# Altium PCB lab1_yarmak_usb_spi.PcbDoc
Units mm, origin at the board's own origin, x right, y up, seen from the top; angles counter-clockwise.
Board outline 40 x 20 mm, 4 copper layers (Top Layer, Signal Layer 1, Signal Layer 2, Bottom Layer), stack 1.522 mm thick; 24 components, 23 nets, 98 pads, 17 vias.
Unrouted connection lines stored in the file: 7.
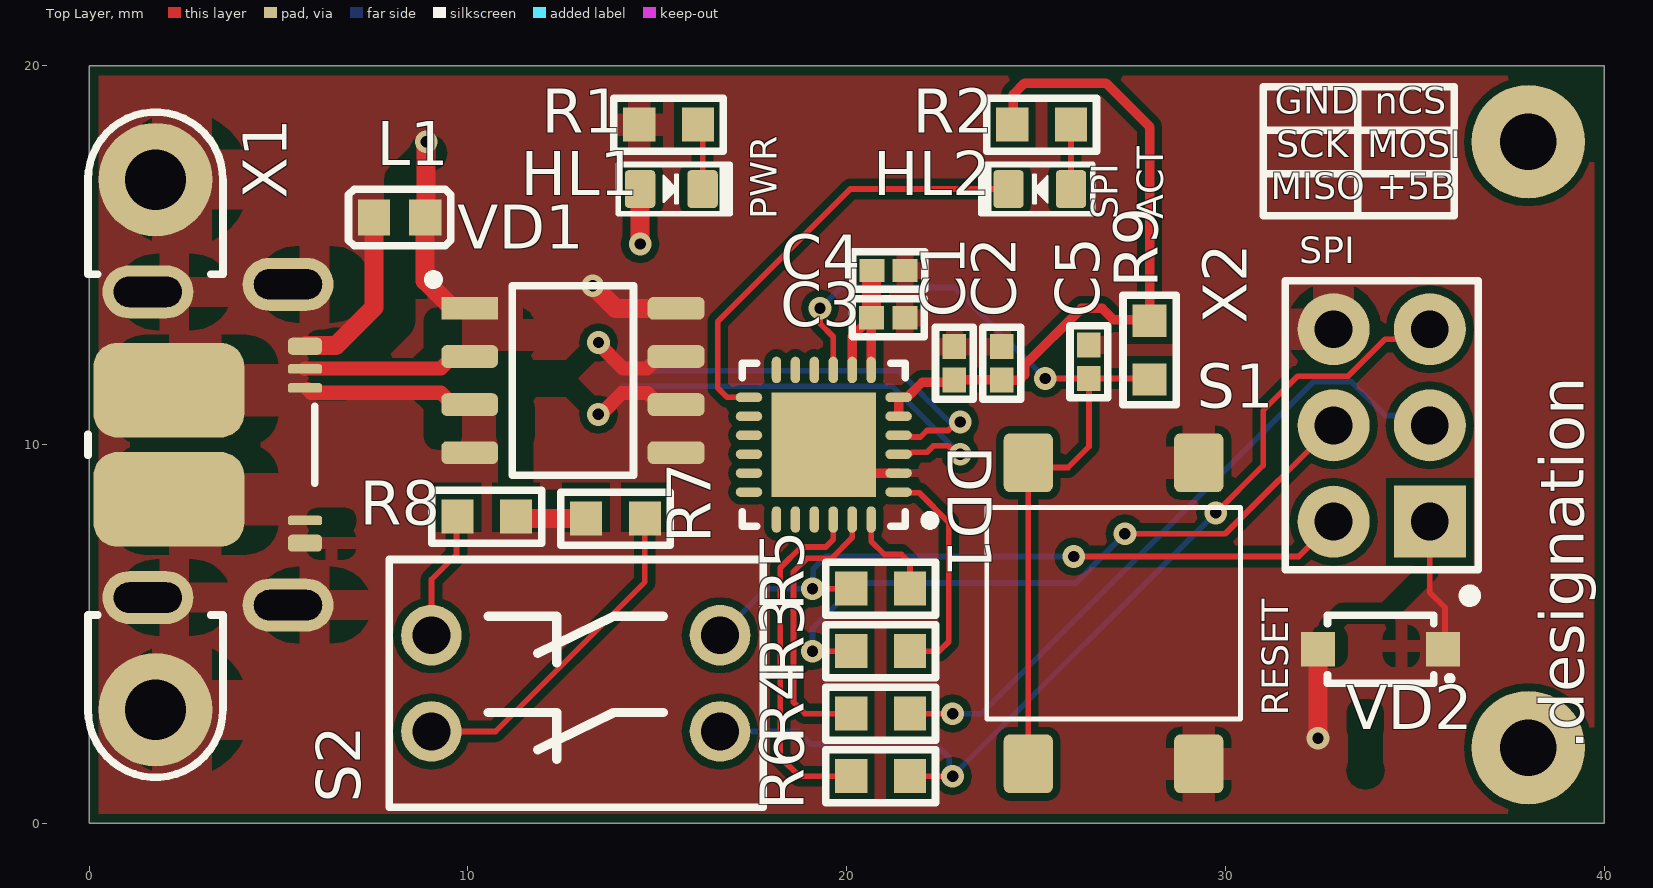
[diagram p0: Top Layer view]
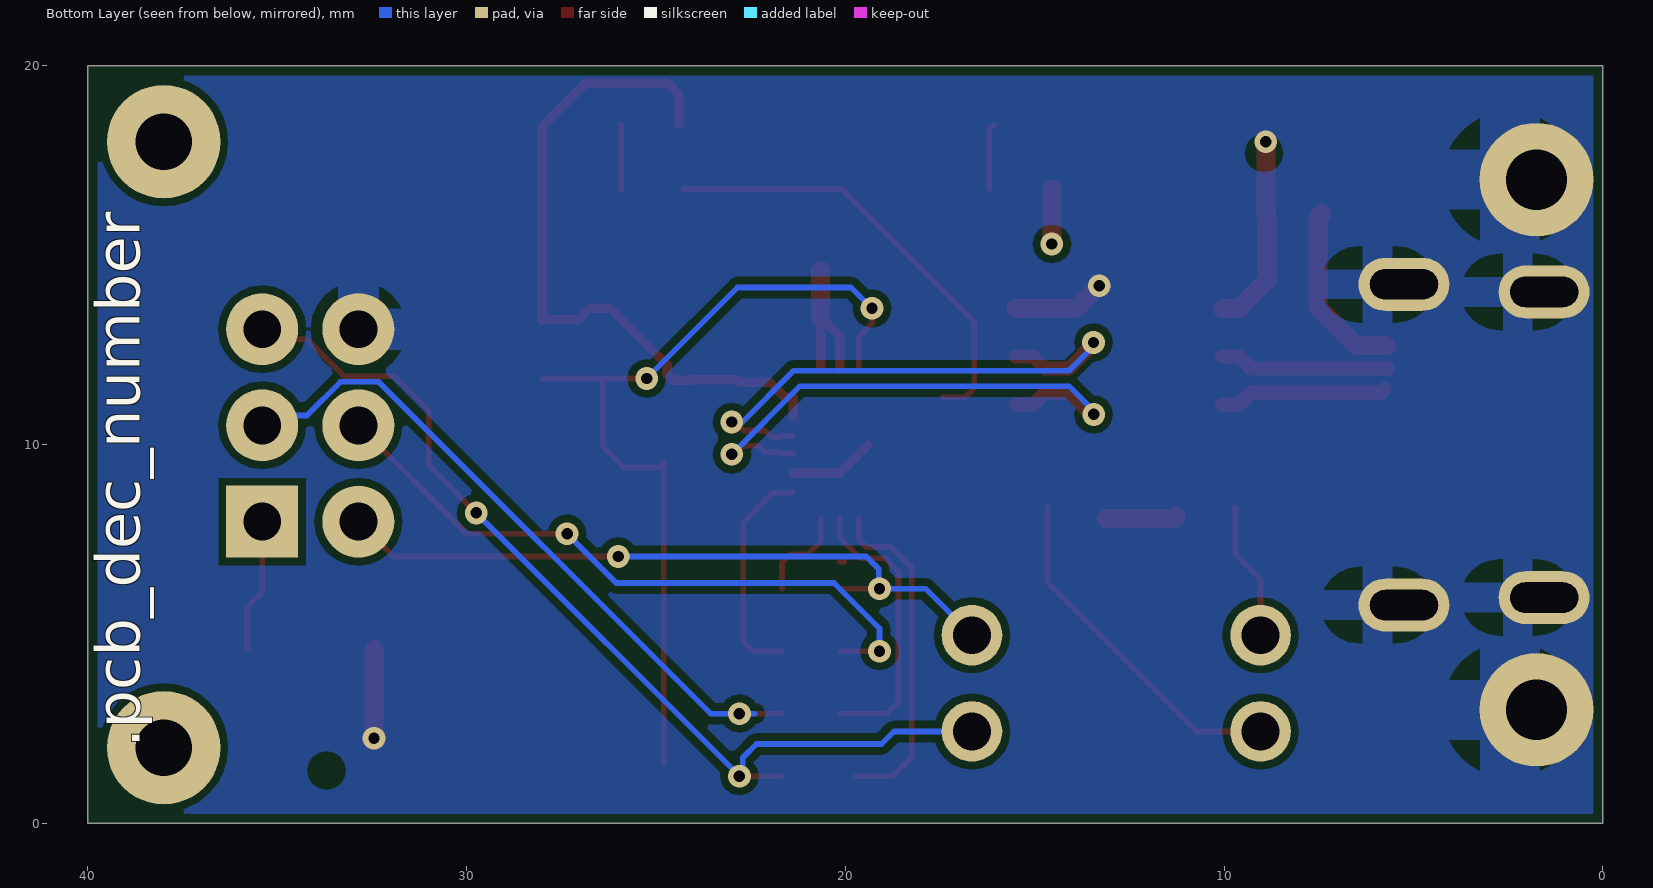
[diagram p1: Bottom Layer view, seen from below]
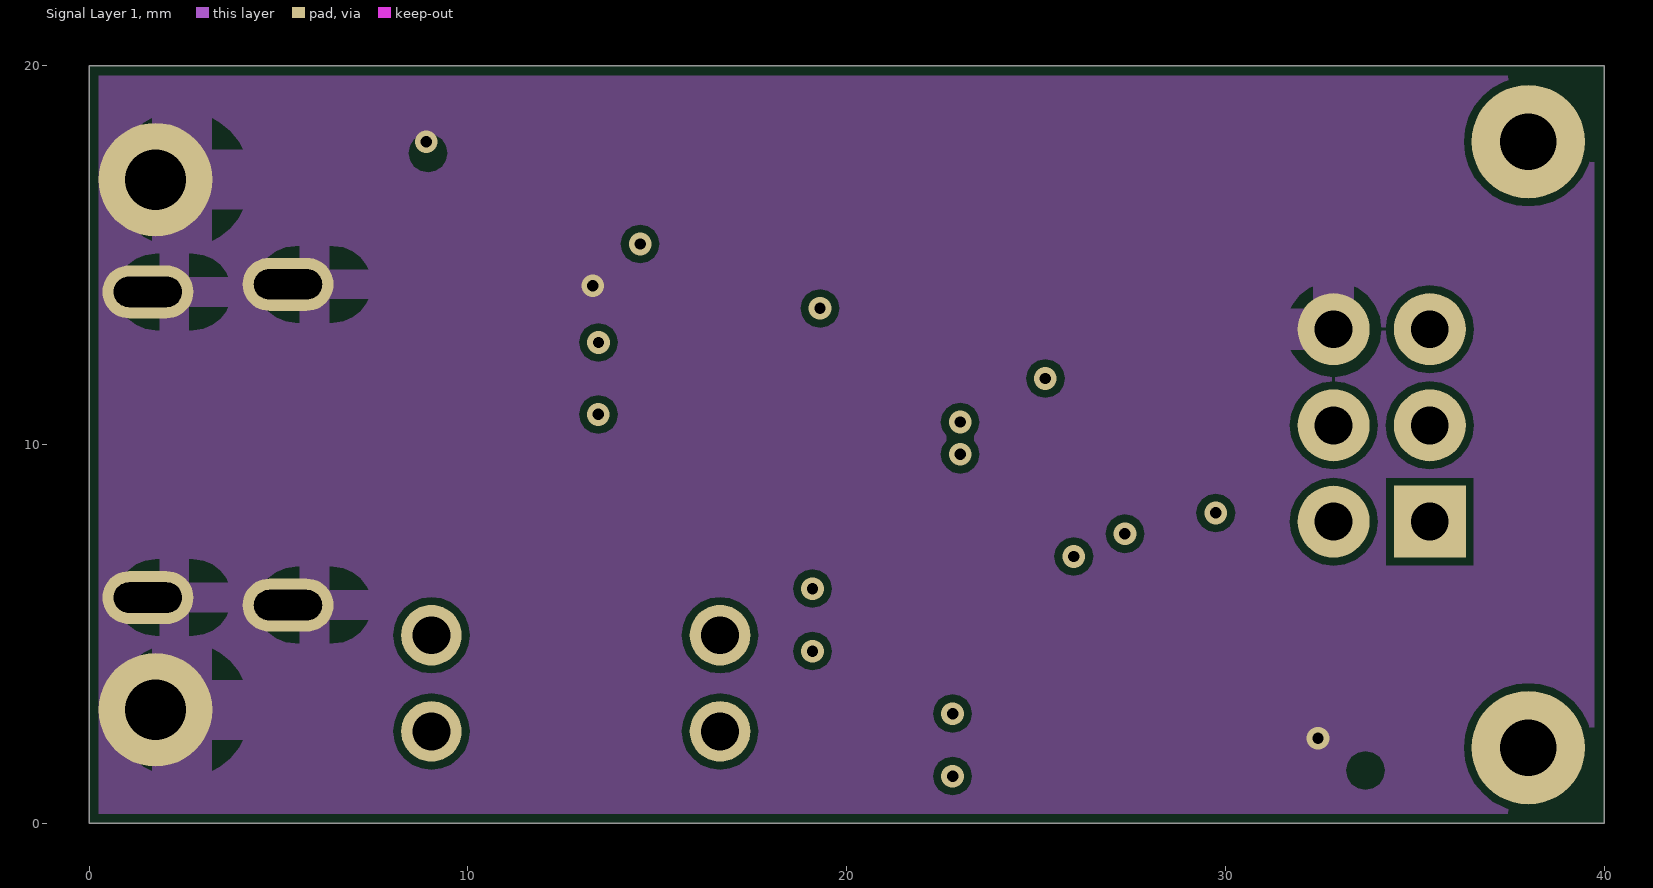
[diagram p2: Signal Layer 1]
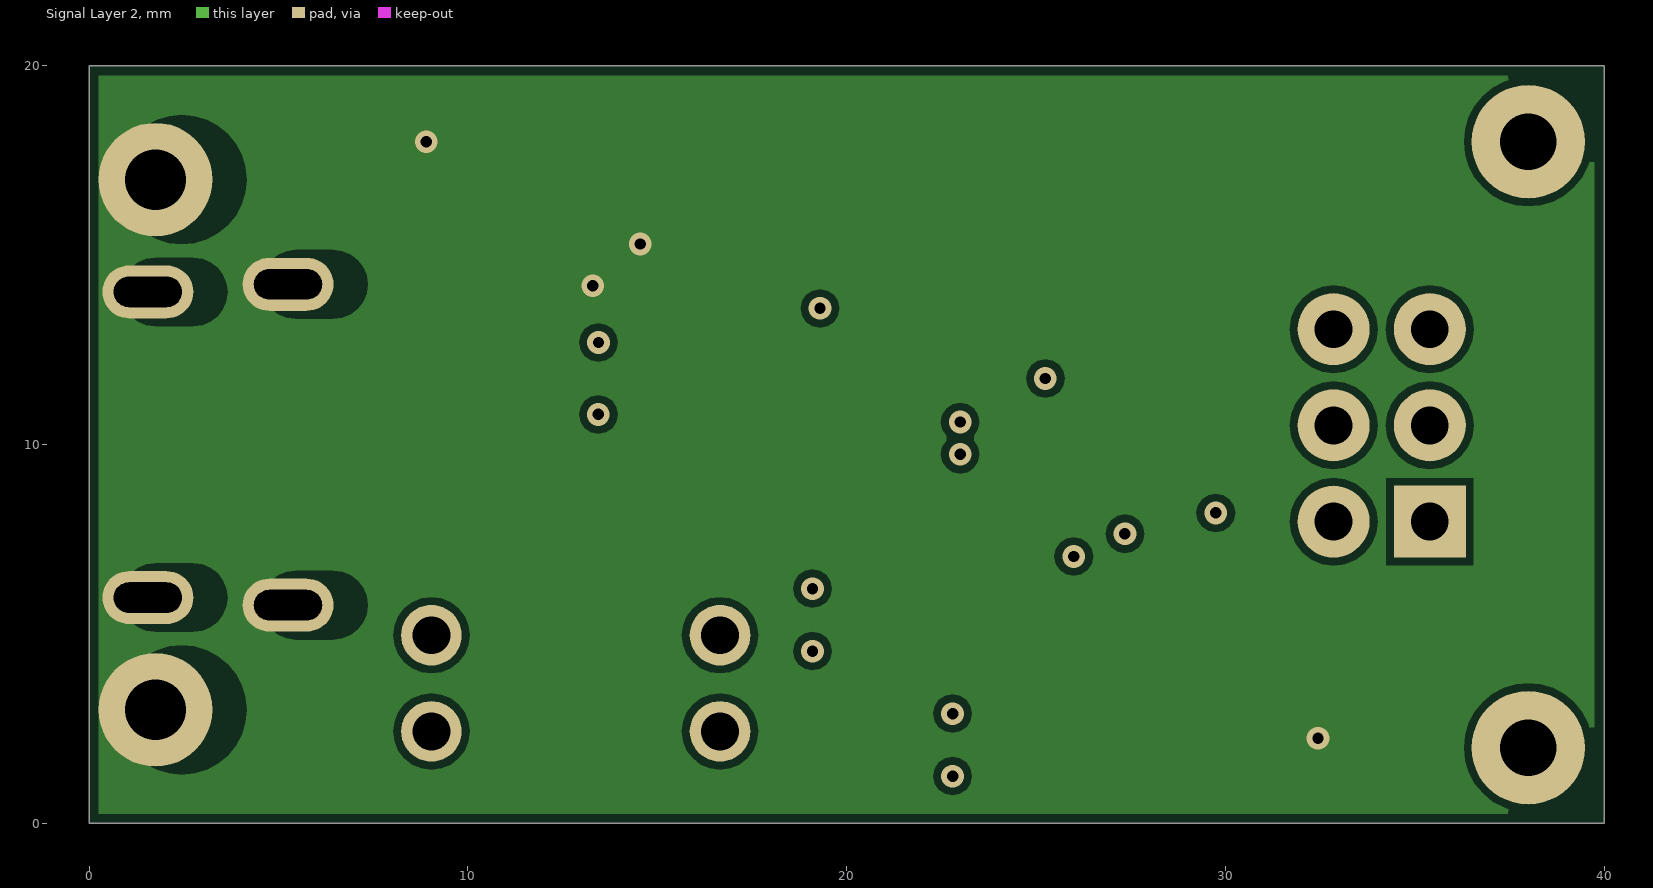
[diagram p3: Signal Layer 2]

## Layer stack, top to bottom
Top Solder: solder mask 0.0102, Solder Resist, Dk 3.5
Top Layer: signal copper 0.018
Prepreg 1: prepreg 0.125, FR4 HiTg170, Dk 5.07
Signal Layer 1: signal copper 0.018
Core 1: core 1.2, FR4, Dk 4.6
Signal Layer 2: signal copper 0.018
Prepreg 2: prepreg 0.125, FR4 HiTg170, Dk 5.07
Bottom Layer: signal copper 0.018
Bottom Solder: solder mask 0.0102, Solder Resist, Dk 3.5

## Board outline
0,0 40,0 40,20 0,20

## Design rules (kind name [scope] priority, off if disabled: settings)
AcuteAngle min_acute_angle [OnCopper] p1: minimum=3.50000000000000E+0001 checktracksonly=FALSE // Минимальный угол между примитивами топологии
BoardOutlineClearance board_outline_clearance_std [NOT (OnLayer('Bottom Overlay') OR OnLayer('Top Overlay'))] p1: gap=0.25 ignorepadtopadclearanceinfootprint=FALSE except(0: Arc-SplitContinuation Track-SplitContinuation SMDPad-SplitContinuation THPad-SplitContinuation Via-SplitContinuation Fill-SplitContinuation Poly-SplitContinuation Region-SplitContinuation Text-SplitContinuation) // Отступ элементов топологии от края фрезеруемой печатной платы
Clearance clearance_outer_18um_std [OnTopLayer OR OnBottomLayer] p1: gap=0.125 ignorepadtopadclearanceinfootprint=TRUE except(0.2: Arc-Fill Arc-Poly Track-Fill Track-Poly SMDPad-SMDPad SMDPad-Fill SMDPad-Poly THPad-Fill THPad-Poly Via-Fill Via-Poly Fill-Fill Fill-Poly Poly-Poly Poly-Region Poly-Text; 0.25: Arc-Hole Track-Hole SMDPad-Hole THPad-Hole Via-Hole Fill-Hole Poly-Hole Region-Hole Text-Hole) // Зазоры на внешних слоях
Clearance clearance_inner_18um_std [NOT (OnTopLayer Or OnBottomLayer)] p2: gap=0.125 ignorepadtopadclearanceinfootprint=FALSE except(0.2: Arc-Fill Arc-Poly Track-Fill Track-Poly SMDPad-SMDPad SMDPad-Fill SMDPad-Poly THPad-Fill THPad-Poly Via-Fill Via-Poly Fill-Fill Fill-Poly Poly-Poly Poly-Region Poly-Text; 0.25: Arc-Hole Track-Hole SMDPad-Hole THPad-Hole Via-Hole Fill-Hole Poly-Hole Region-Hole Text-Hole) // Зазоры на внутренних слоях
ComponentClearance [All] p1: gap=0 collisioncheckmode=3 verticalgap=0 showdistances=FALSE
DiffPairsRouting [All] p1: maxlimit=0.254 minlimit=0.254 mostfreqgap=0.254 toplayer_minwidth=0.1 toplayer_maxwidth=0.381 toplayer_prefwidth=0.381 midlayer1_minwidth=0.1 midlayer1_maxwidth=0.381 midlayer1_prefwidth=0.381 midlayer2_minwidth=0.1 midlayer2_maxwidth=0.381 midlayer2_prefwidth=0.381 bottomlayer_minwidth=0.1 bottomlayer_maxwidth=0.381 bottomlayer_prefwidth=0.381 maxuncoupledlength=12.7
HoleSize min_hole_size_std [IsPad] p1: absolutevalues=TRUE maxlimit=5.9 minlimit=0.6 maxpercent=80.000 minpercent=20.000 // Диаметр межслойного переходного отверстия
HoleSize min_hole_size_via_std [IsVia] p2: absolutevalues=TRUE maxlimit=5.9 minlimit=0.3 maxpercent=80.000 minpercent=20.000 // Минимальный диаметр монтажного отверстия
HoleToHoleClearance hole_to_hole_clearance_std [All] p1: gap=0.2 allowstackedmicrovias=FALSE // Минимальное расстояние между краями двух отверстий
MinimumAnnularRing min_via_ar_std [All] p1: minimumring=0.15 // Поясок площадки переходного отверстия (Annular ring VIA)
MinimumAnnularRing min_pad_ar_std [All] p2: minimumring=0.2 // Поясок монтажной контактной площадки (Annular ring PAD)
MinimumSolderMaskSliver min_solder_mask_bridge_std [All] p1: minsoldermaskwidth=0.15 // Мнимальная ширина масочного мостика
PlaneClearance plane_clearance_18um_std [All] p1: clearance=0.2 // Отступ полигона (для слоя plane) от элементов топологии
PlaneConnect [All] p1: planeconnectstyle=Relief reliefexpansion=0.5 reliefentries=4 reliefconductorwidth=0.2 reliefairgap=0.2
PolygonConnect poly_connect_to_pad<=0.3 [(AsMM(PadXSize_AllLayers)<=0.301) or (AsMM(PadYSize_AllLayers)<=0.301)] p1: thpad.connectstyle=Relief thpad.reliefconductorwidth=0.2 thpad.reliefentries=4 thpad.polygonreliefangle="90 Angle" thpad.airgapwidth=0.2 smdpad.connectstyle=Relief smdpad.reliefconductorwidth=0.2 smdpad.reliefentries=4 smdpad.polygonreliefangle="90 Angle" smdpad.airgapwidth=0.2 via.connectstyle=Direct via.reliefconductorwidth=0.254 via.reliefentries=4 via.polygonreliefangle="90 Angle" via.airgapwidth=0.254 // Правила подключения полигонов для падов от 0,3мм и меньше
PolygonConnect poly_connect_to_pad<=0.4 [(AsMM(PadXSize_AllLayers)<=0.401) or (AsMM(PadYSize_AllLayers)<=0.401)] p2: thpad.connectstyle=Relief thpad.reliefconductorwidth=0.26 thpad.reliefentries=4 thpad.polygonreliefangle="90 Angle" thpad.airgapwidth=0.2 smdpad.connectstyle=Relief smdpad.reliefconductorwidth=0.26 smdpad.reliefentries=4 smdpad.polygonreliefangle="90 Angle" smdpad.airgapwidth=0.2 via.connectstyle=Direct via.reliefconductorwidth=0.254 via.reliefentries=4 via.polygonreliefangle="90 Angle" via.airgapwidth=0.254 // Правила подключения полигонов для падов от 0,4 и меньше
PolygonConnect poly_connect_to_pad<=0.6 [(AsMM(PadXSize_AllLayers)<=0.601) or (AsMM(PadYSize_AllLayers)<=0.601)] p3: thpad.connectstyle=Relief thpad.reliefconductorwidth=0.33 thpad.reliefentries=4 thpad.polygonreliefangle="90 Angle" thpad.airgapwidth=0.2 smdpad.connectstyle=Relief smdpad.reliefconductorwidth=0.33 smdpad.reliefentries=4 smdpad.polygonreliefangle="90 Angle" smdpad.airgapwidth=0.2 via.connectstyle=Direct via.reliefconductorwidth=0.254 via.reliefentries=4 via.polygonreliefangle="90 Angle" via.airgapwidth=0.254 // Правила подключения полигонов для падов от 0,6мм и меньше
PolygonConnect poly_connect_to_pad<=0.7 [(AsMM(PadXSize_AllLayers)<=0.701) or (AsMM(PadYSize_AllLayers)<=0.701)] p4: thpad.connectstyle=Relief thpad.reliefconductorwidth=0.46 thpad.reliefentries=4 thpad.polygonreliefangle="90 Angle" thpad.airgapwidth=0.2 smdpad.connectstyle=Relief smdpad.reliefconductorwidth=0.46 smdpad.reliefentries=4 smdpad.polygonreliefangle="90 Angle" smdpad.airgapwidth=0.2 via.connectstyle=Direct via.reliefconductorwidth=0.254 via.reliefentries=4 via.polygonreliefangle="90 Angle" via.airgapwidth=0.254 // Правила подключения полигонов для падов от 0,7мм и меньше
PolygonConnect poly_connect_to_pad<=0.8 [(AsMM(PadXSize_AllLayers)<=0.8)or(AsMM(PadYSize_AllLayers)<=0.8)] p5: thpad.connectstyle=Relief thpad.reliefconductorwidth=0.53 thpad.reliefentries=4 thpad.polygonreliefangle="90 Angle" thpad.airgapwidth=0.3 smdpad.connectstyle=Relief smdpad.reliefconductorwidth=0.53 smdpad.reliefentries=4 smdpad.polygonreliefangle="90 Angle" smdpad.airgapwidth=0.2 via.connectstyle=Direct via.reliefconductorwidth=0.254 via.reliefentries=4 via.polygonreliefangle="90 Angle" via.airgapwidth=0.254 // Правила подключения полигонов для падов от 0,8мм и меньше
PolygonConnect poly_connect_to_pad<=1 [(AsMM(PadXSize_AllLayers)<=1.01)or(AsMM(PadYSize_AllLayers)<=1.01)] p6: thpad.connectstyle=Relief thpad.reliefconductorwidth=0.6 thpad.reliefentries=4 thpad.polygonreliefangle="90 Angle" thpad.airgapwidth=0.3 smdpad.connectstyle=Relief smdpad.reliefconductorwidth=0.6 smdpad.reliefentries=4 smdpad.polygonreliefangle="90 Angle" smdpad.airgapwidth=0.2 via.connectstyle=Direct via.reliefconductorwidth=0.254 via.reliefentries=4 via.polygonreliefangle="90 Angle" via.airgapwidth=0.254 // Правила подключения полигонов для падов от 1мм и меньше
PolygonConnect poly_connect_to_pad<=1.3 [(AsMM(PadXSize_AllLayers)<=1.31)or(AsMM(PadYSize_AllLayers)<=1.31)] p7: thpad.connectstyle=Relief thpad.reliefconductorwidth=0.66 thpad.reliefentries=4 thpad.polygonreliefangle="90 Angle" thpad.airgapwidth=0.3 smdpad.connectstyle=Relief smdpad.reliefconductorwidth=0.86 smdpad.reliefentries=4 smdpad.polygonreliefangle="90 Angle" smdpad.airgapwidth=0.2 via.connectstyle=Direct via.reliefconductorwidth=0.254 via.reliefentries=4 via.polygonreliefangle="90 Angle" via.airgapwidth=0.254 // Правила подключения полигонов для падов от 1,3мм и меньше
PolygonConnect poly_connect_to_pad<=1.6 [(AsMM(PadXSize_AllLayers)<=1.61)or(AsMM(PadYSize_AllLayers)<=1.61)] p8: thpad.connectstyle=Relief thpad.reliefconductorwidth=0.8 thpad.reliefentries=4 thpad.polygonreliefangle="90 Angle" thpad.airgapwidth=0.3 smdpad.connectstyle=Relief smdpad.reliefconductorwidth=1 smdpad.reliefentries=4 smdpad.polygonreliefangle="90 Angle" smdpad.airgapwidth=0.2 via.connectstyle=Direct via.reliefconductorwidth=0.254 via.reliefentries=4 via.polygonreliefangle="90 Angle" via.airgapwidth=0.254 // Правила подключения полигонов для падов от 1,6мм и меньше
PolygonConnect poly_connect_to_pad<=1.8 [(AsMM(PadXSize_AllLayers)<=1.8)or(AsMM(PadYSize_AllLayers)<=1.8)] p9: thpad.connectstyle=Relief thpad.reliefconductorwidth=1 thpad.reliefentries=4 thpad.polygonreliefangle="90 Angle" thpad.airgapwidth=0.3 smdpad.connectstyle=Relief smdpad.reliefconductorwidth=1.2 smdpad.reliefentries=4 smdpad.polygonreliefangle="90 Angle" smdpad.airgapwidth=0.2 via.connectstyle=Direct via.reliefconductorwidth=0.254 via.reliefentries=4 via.polygonreliefangle="90 Angle" via.airgapwidth=0.254 // Правила подключения полигонов для падов от 1,8мм и меньше
PolygonConnect poly_connect_to_pad<=2 [(AsMM(PadXSize_AllLayers)<=2.01)or(AsMM(PadYSize_AllLayers)<=2.01)] p10: thpad.connectstyle=Relief thpad.reliefconductorwidth=1.1 thpad.reliefentries=4 thpad.polygonreliefangle="90 Angle" thpad.airgapwidth=0.3 smdpad.connectstyle=Relief smdpad.reliefconductorwidth=1.4 smdpad.reliefentries=4 smdpad.polygonreliefangle="90 Angle" smdpad.airgapwidth=0.2 via.connectstyle=Direct via.reliefconductorwidth=0.254 via.reliefentries=4 via.polygonreliefangle="90 Angle" via.airgapwidth=0.254 // Правила подключения полигонов для падов от 2мм и меньше
PolygonConnect poly_connect_to_pad<=2.3 [(AsMM(PadXSize_AllLayers)<=2.31)or(AsMM(PadYSize_AllLayers)<=2.31)] p11: thpad.connectstyle=Relief thpad.reliefconductorwidth=1.2 thpad.reliefentries=4 thpad.polygonreliefangle="90 Angle" thpad.airgapwidth=0.3 smdpad.connectstyle=Relief smdpad.reliefconductorwidth=1.4 smdpad.reliefentries=4 smdpad.polygonreliefangle="90 Angle" smdpad.airgapwidth=0.2 via.connectstyle=Direct via.reliefconductorwidth=0.254 via.reliefentries=4 via.polygonreliefangle="90 Angle" via.airgapwidth=0.254 // Правила подключения полигонов для падов от 2,3мм и меньше
PolygonConnect poly_connect_to_pad<=2.5 [(AsMM(PadXSize_AllLayers)<=2.51)or(AsMM(PadYSize_AllLayers)<=2.51)] p12: thpad.connectstyle=Relief thpad.reliefconductorwidth=1.2 thpad.reliefentries=4 thpad.polygonreliefangle="90 Angle" thpad.airgapwidth=0.3 smdpad.connectstyle=Relief smdpad.reliefconductorwidth=1.4 smdpad.reliefentries=4 smdpad.polygonreliefangle="90 Angle" smdpad.airgapwidth=0.2 via.connectstyle=Direct via.reliefconductorwidth=0.254 via.reliefentries=4 via.polygonreliefangle="90 Angle" via.airgapwidth=0.254 // Правила подключения полигонов для падов от 2,5мм и меньше
PolygonConnect poly_connect_to_pad<=2.7 [(AsMM(PadXSize_AllLayers)<=2.71)or(AsMM(PadYSize_AllLayers)<=2.71)] p13: thpad.connectstyle=Relief thpad.reliefconductorwidth=1.4 thpad.reliefentries=4 thpad.polygonreliefangle="90 Angle" thpad.airgapwidth=0.3 smdpad.connectstyle=Relief smdpad.reliefconductorwidth=1.6 smdpad.reliefentries=4 smdpad.polygonreliefangle="90 Angle" smdpad.airgapwidth=0.2 via.connectstyle=Direct via.reliefconductorwidth=0.254 via.reliefentries=4 via.polygonreliefangle="90 Angle" via.airgapwidth=0.254 // Правила подключения полигонов для падов от 2,7мм и меньше
PolygonConnect poly_connect_to_pad<=3 [(AsMM(PadXSize_AllLayers)<=3.01)or(AsMM(PadYSize_AllLayers)<=3.01)] p14: thpad.connectstyle=Relief thpad.reliefconductorwidth=1.6 thpad.reliefentries=4 thpad.polygonreliefangle="90 Angle" thpad.airgapwidth=0.3 smdpad.connectstyle=Relief smdpad.reliefconductorwidth=1.8 smdpad.reliefentries=4 smdpad.polygonreliefangle="90 Angle" smdpad.airgapwidth=0.2 via.connectstyle=Direct via.reliefconductorwidth=0.254 via.reliefentries=4 via.polygonreliefangle="90 Angle" via.airgapwidth=0.254 // Правила подключения полигонов для падов от 3мм и меньше
PolygonConnect poly_connect_to_pad<=7 [(AsMM(PadXSize_AllLayers)<7.01)or(AsMM(PadYSize_AllLayers)<=7.01)] p15: thpad.connectstyle=Relief thpad.reliefconductorwidth=2 thpad.reliefentries=4 thpad.polygonreliefangle="90 Angle" thpad.airgapwidth=0.4 smdpad.connectstyle=Relief smdpad.reliefconductorwidth=2 smdpad.reliefentries=4 smdpad.polygonreliefangle="90 Angle" smdpad.airgapwidth=0.3 via.connectstyle=Direct via.reliefconductorwidth=0.254 via.reliefentries=4 via.polygonreliefangle="90 Angle" via.airgapwidth=0.254 // Правила подключения полигонов для падов от 7мм и меньше
PolygonConnect poly_connect_to_pad [All] p16: thpad.connectstyle=Relief thpad.reliefconductorwidth=0.25 thpad.reliefentries=4 thpad.polygonreliefangle="90 Angle" thpad.airgapwidth=0.2 smdpad.connectstyle=Relief smdpad.reliefconductorwidth=0.25 smdpad.reliefentries=4 smdpad.polygonreliefangle="90 Angle" smdpad.airgapwidth=0.2 via.connectstyle=Direct via.reliefconductorwidth=0.25 via.reliefentries=4 via.polygonreliefangle="90 Angle" via.airgapwidth=0.2 // Правила подключения полигонов общие
RoutingCorners [All] p1 off: cornerstyle=45-Degree minsetback=2.5 maxsetback=2.5
RoutingVias [All] p1: holewidth=0.3 width=0.6 viastyle="Through Hole" minholewidth=0.3 minwidth=0.6 maxholewidth=5.9 maxwidth=6.4
SilkToSilkClearance silk_to_silk_clearance_std [All] p1 off: silktosilkclearance=0.15 // Отступ текста шелкографии от других примитивов шелкографии
SilkToSolderMaskClearance silk_to_solder_mask_clearance_std [IsPad] p1 off: minsilkscreentomaskgap=0.15 clearancetoexposedcopper=FALSE // Минимальное расстояние между элементами шелкографии и вскрытой медью
SolderMaskExpansion solder_mask_expansion_std [All] p1: expansion=0.05 // Припуск паяльной масски
UnRoutedNet [All] p1: checkbadconnections=TRUE
Width width_18um_std [All] p1: maxlimit=10 minlimit=0.125 preferedwidth=0.15 checkconnectedcopper=TRUE // Ширина проводников (общая)
19 further rules are at their usual default settings.

## Classes and differential pairs
differential pair class USB_SIGNALS: CN_D MCU_D
differential pair MCU_D: +MCU_D_P -MCU_D_N
differential pair CN_D: +CN_D_P -CN_D_N

## Components (designator, comment, footprint, x,y, rotation, side; value= is the part's Value field where it differs from the comment)
C1 "4.7 мк" C0402 22.85,12.15 r270 top
C2 "0.1 мк" C0402 24.1,12.15 r90 top
C3 "0.1 мк" C0402 21.1,13.35 r0 top
C4 "1 мк" C0402 21.11,14.6 r180 top
C5 "0.1 мк" C0402 26.4,12.19 r90 top
DD1 "DD-CP2130" CP2130 19.4,10 r180 top
HL1 "TLMS1100-GS08" LED 15.375,16.75 r0 top
HL2 "TLMG1100-GS08" LED_GREEN 25.1,16.75 r180 top
L1 "BLM18PG221SN1D" L0603 8.2,16 r0 top
R1 "330" R0603 15.3,18.45 r0 top
R2 "330" R0603 25.15,18.45 r0 top
R3 "33" R0603 20.9,4.55 r180 top
R4 "33" R0603 20.9,2.9 r0 top
R5 "33" R0603 20.9,6.2 r180 top
R6 "33" R0603 20.9,1.25 r0 top
R7 "10 к" R0603 13.9,8.05 r0 top
R8 "10 к" R0603 10.5,8.1 r180 top
R9 "10 к" R0603 28,12.5 r270 top
S1 "B3S-1000" BUTTON 27.05,5.55 r270 top
S2 "A6E-2104-N" A6E-2104-N 12.85,3.7 r90 top
VD1 "USB6B1" SOIC-8-P127-490X390X175-L84X41 12.775,11.695 r0 top
VD2 "MBR0530T1G" SOD-123-368X160X135 34.1,4.6 r180 top
X1 "2108877-1" 2108877-1 2.004,10 r90 top
X2 "DS1021-2*3SF11" PLS_2.54_2x3 34.13,10.51 r90 top

## Footprints (in the part's own frame and the unit in brackets; to place one, negate y for a bottom-side part, rotate by r counter-clockwise, add the part's x,y. Pads: shape width x height; smd on the part's side, far side on the other; paste and mask are expansions set on the pad)
2108877-1 [mm] "Micro USB-B, flanged"
  rrect50% 0.45x0.9 smd: 1(2.6,-3.696) 5(-2.6,-3.696)
  rrect50% 0.25x0.9 smd: 2(2,-3.696) 3(1.5,-3.696) 4(-2,-3.696)
  round 3 hole 1.6: TP1(-7,0.25) TP1(7,0.25)
  oval 1.4x2.4 hole 0.8 slot 1.8 at 90 deg mask+0.102: TP1(-4.235,-3.25) TP1(-4.035,0.45) TP1(4.035,0.45) TP1(4.235,-3.25)
  rrect50% 2.5x3.98 smd: TP1(-1.441,-0.104) TP1(1.441,-0.104)
  silkscreen extent -8.78,-3.95 8.78,2.03, body extent -8.9,-3.95 8.9,3.95, height 3.39
A6E-2104-N [mm] "Box type Through-hole Mounting DIP Switch"
  round 1.6 hole 1: 1(-1.27,3.81) 2(-1.27,-3.81) 3(1.27,3.81) 4(1.27,-3.81)
  silkscreen extent -3.27,-4.95 3.27,4.92, body extent -3.32,-4.9 3.32,4.9, height 6.9
BUTTON [mm] "Switch push button"
  rrect25% 1.55x1.3 smd: 1(-3.975,2.25) 1(3.975,2.25) 2(-3.975,-2.25) 2(3.975,-2.25)
  silkscreen extent -2.79,-3.35 2.79,3.35, body extent -4.51,-3.3 4.51,3.3, height 4.3
C0402 [mm] "Chip Capacitor, 2-Leads, Body 1,00x0,50mm, IPC Medium Density"
  rect 0.66x0.62 smd: 1(-0.44,0) 2(0.44,0)
  silkscreen extent -0.95,-0.5 0.95,0.5, body extent -0.53,-0.28 0.53,0.27, height 0.55
CP2130 [mm] "QFN, 24-Leads, Body 4,00x4,00mm, Pitch 0,50mm, Thermal Pad 2,75x2,75mm, IPC Medium Density"
  rect 2.75x2.75 smd: 0(0,0)
  oval 0.7x0.25 smd: 1(-1.975,1.25) 2(-1.975,0.75) 3(-1.975,0.25) 4(-1.975,-0.25) 5(-1.975,-0.75) 6(-1.975,-1.25) 13(1.975,-1.25) 14(1.975,-0.75) 15(1.975,-0.25) 16(1.975,0.25) 17(1.975,0.75) 18(1.975,1.25)
  oval 0.25x0.7 smd: 7(-1.25,-1.975) 8(-0.75,-1.975) 9(-0.25,-1.975) 10(0.25,-1.975) 11(0.75,-1.975) 12(1.25,-1.975) 19(1.25,1.975) 20(0.75,1.975) 21(0.25,1.975) 22(-0.25,1.975) 23(-0.75,1.975) 24(-1.25,1.975)
  silkscreen extent -2.93,-2.15 2.15,2.15, body extent -2,-2 2,2, height 0.8
L0603 [mm] "Ferrite bead"
  rect 0.85x0.95 smd: 1(-0.675,0) 2(0.675,0)
  silkscreen extent -1.35,-0.75 1.35,0.75, body extent -0.85,-0.45 0.85,0.45, height 0.9
LED [mm] "LED"
  rrect25% 0.8x1 smd paste-10 mask+0.1: 1(-0.825,0) 2(0.825,0)
  silkscreen extent -1.4,-0.65 1.55,0.65, body extent -0.81,-0.4 0.81,0.4, height 0.6
LED_GREEN [mm] "Green LED"
  rrect25% 0.8x1 smd paste-10 mask+0.1: 1(-0.825,0) 2(0.825,0)
  silkscreen extent -1.4,-0.65 1.55,0.65, body extent -0.8,-0.4 0.8,0.4, height 0.8
PLS_2.54_2x3 [mm] "PLS connector 6 pin"
  rect 1.9x1.9 hole 1: 1(-2.54,-1.27)
  round 1.9 hole 1: 2(-2.54,1.27) 3(0,-1.27)
  round 1.9 hole 1 mask+0.102: 4(0,1.27) 5(2.54,-1.27) 6(2.54,1.27)
  silkscreen extent -4.5,-2.55 3.81,2.54, body extent -3.81,-2.54 3.81,2.54, height 8.59
R0603 [mm] "Chip Resistor, 2-Leads, Body 1,60x0,80mm, IPC Medium Density"
  rect 0.85x0.9 smd: 1(-0.775,0) 2(0.775,0)
  silkscreen extent -1.45,-0.7 1.45,0.7, body extent -0.85,-0.45 0.85,0.45, height 0.55
SOD-123-368X160X135 [mm] "SOD, 2-Leads, Body 3,68x1,60mm, IPC Medium Density"
  rect 0.9x0.9 smd: 1(-1.65,0) 2(1.65,0)
  silkscreen extent -1.87,-0.9 1.4,0.9, body extent -1.82,-0.77 1.83,0.78, height 1.5
SOIC-8-P127-490X390X175-L84X41 [mm] "SOIC, 8-Leads, Body 4,90x3,90mm, Pitch 1,27mm, IPC Medium Density"
  rect 1.5x0.6 smd: 1(-2.725,1.905)
  rrect50% 1.5x0.6 smd: 2(-2.725,0.635) 3(-2.725,-0.635) 4(-2.725,-1.905) 5(2.725,-1.905) 6(2.725,-0.635) 7(2.725,0.635) 8(2.725,1.905)
  silkscreen extent -3.81,-2.5 1.6,2.79, body extent -3.06,-2.47 3.06,2.48, height 1.75

## Part data
C1: library part c0002, "=Описание", HelpURL=http://product.samsungsem.com/mlcc/CL05A475KP5NRN.do, ID=c0002, Корпус=0402, Наименование=CL05A475KP5NRNC, Напряжение="10 В", Номинал="4.7 мк", Номинальное напряжение="10 В", Описание="Конденсатор чип 0402 4,7 мкФ 10 В ±10 %", Отклонение="±10 %", Примечание=X5R, Производитель="Samsung electro-mechanics", Рабочие температуры="от -55 °С до +85 °С", Фамилия=Засецкий
C2 C3 C5: library part c0003, "=Описание", HelpURL=http://product.samsungsem.com/mlcc/CL05B104JO5NNN.do, ID=c0003, Корпус=0402, Наименование=CL05B104JO5NNNC, Напряжение="16 В", Номинал="0.1 мк", Номинальное напряжение="16 В", Описание="Конденсатор чип 0402 0,1 мкФ 16 В ±5 %", Отклонение="±5 %", Примечание=X7R, Производитель="Samsung electro-mechanics", Рабочие температуры="от -55 °С до +125 °С", Фамилия=Засецкий
C4: library part c0004, "=Описание", HelpURL=http://product.samsungsem.com/mlcc/CL05A105KO5NNN.do, ID=c0004, Корпус=0402, Наименование=CL05A475KP5NRNC, Напряжение="16 В", Номинал="1 мк", Номинальное напряжение="16 В", Описание="Конденсатор чип 0402 1 мкФ 16 В ±10 %", Отклонение="±10 %", Примечание=X5R, Производитель="Samsung electro-mechanics", Рабочие температуры="от -55 °С до +85 °С", Фамилия=Засецкий
DD1: library part dd0001, "=Описание", HelpURL=https://www.silabs.com/documents/public/data-sheets/CP2130.pdf, ID=dd0001, Корпус=QFN-24, Наименование=CP2130, Описание="Контроллер интерфейса ввода вывода USB to SPI Bridge QFN24", Производитель="Silicon Labs", Рабочие температуры="от -40 °С до +85 °С", Фамилия=Засецкий
HL1: library part hl0001, "=Описание", HelpURL=https://www.vishay.com/docs/83173/tlmb1100.pdf, ID=hl0001, Корпус=0603, Наименование=TLMS1100-GS08, Номинальный ток="30 мА", Описание="Светодиод красный чип 0603", Примечание=Красный, Производитель=Vishay, Рабочие температуры="от -40 °С до +100 °С", Фамилия=Засецкий
HL2: library part hl0002, "=Описание", HelpURL=https://www.vishay.com/docs/83173/tlmb1100.pdf, ID=hl0002, Корпус=0603, Наименование=TLMG1100-GS08, Номинальный ток="30 мА", Описание="Светодиод зелёный чип 0603", Примечание=Зелёный, Производитель=Vishay, Рабочие температуры="от -40 °С до +100 °С", Фамилия=Засецкий
L1: library part l0001, "=Описание", HelpURL=http://www.yageo.ru/pdf/RC0603.pdf, ID=l0001, Корпус=0603, Наименование=BLM18PG221SN1D, Номинальный ток="1 А", Описание="Ферритовая бусина", Отклонение="±25 %", Производитель=muRata, Рабочие температуры="от -55 °С до +125 °С", Фамилия=Засецкий
R1 R2: library part r0004, "=Описание", HelpURL=http://www.yageo.ru/pdf/RC0603.pdf, ID=r0004, Корпус=0603, Наименование=RC0603FR-07330RL, Номинал=330, Номинальное напряжение="50 В", Номинальный ток="1 А", Описание="Резистор чип 0603 330 Ом 0,1 Вт ±1 %", Отклонение="±1 %", Производитель=Yageo, Рабочие температуры="от -50 °С до +150 °С", Фамилия=Засецкий
R3 R4 R5 R6: library part r0007, "=Описание", HelpURL=http://www.yageo.ru/pdf/RC0603.pdf, ID=r0007, Корпус=0603, Наименование=RC0603FR-0733RL, Номинал=33, Номинальное напряжение="50 В", Номинальный ток="1 А", Описание="Резистор чип 0603 33 Ом 0,1 Вт ±1 %", Отклонение="±1 %", Производитель=Yageo, Рабочие температуры="от -50 °С до +150 °С", Фамилия=Засецкий
R7 R8 R9: library part r0006, "=Описание", HelpURL=http://www.yageo.ru/pdf/RC0603.pdf, ID=r0006, Корпус=0603, Наименование=RC0603FR-0710KL, Номинал="10 к", Номинальное напряжение="50 В", Номинальный ток="1 А", Описание="Резистор чип 0603 10 кОм 0,1 Вт ±1 %", Отклонение="±1 %", Производитель=Yageo, Рабочие температуры="от -50 °С до +150 °С", Фамилия=Засецкий
S1: library part sw0001, "=Описание", HelpURL=https://omronfs.omron.com/en_US/ecb/products/pdf/en-b3s.pdf, ID=sw0001, Наименование=B3S-1000, Описание=Кнопка, Производитель=Omron, Фамилия=Засецкий
S2: library part sw0002, "=Описание", HelpURL=https://omronfs.omron.com/en_US/ecb/products/pdf/en-a6en.pdf, ID=sw0002, Наименование=A6E-2104-N, Описание=Переключатель, Производитель=Omron, Фамилия=Засецкий
VD1: library part vd0011, "=Описание", HelpURL=https://www.st.com/content/st_com/en/products/protection-devices/esd-protection/usb-port-protection/usb6b1.html, ID=vd0011, Корпус=SOIC-8, Наименование=USB6B1, Описание="Диодная сборка для подавления помех, от 6 В", Производитель=STMicroelectronics, Фамилия=Ларионов
VD2: library part vd0001, "=Описание", HelpURL=https://www.onsemi.com/products/discretes-drivers/diodes-rectifiers/schottky-diodes-schottky-rectifiers/mbr0530t1g, ID=vd0001, Корпус=SOD-123, Максимальное обратное напряжение="30 В", Максимальное прямое напряжение="0,43 В", Максимальный прямой ток="0,5 А", Наименование=MBR0530T1G, Описание="Диод Шоттки 30 В 0,5 А", Производитель="ON Semiconductor", Рабочие температуры="от –65 °С до +125 °С", Фамилия=Шкабара
X1: library part x0002, "=Описание", ID=x0002, Наименование=2108877-1, Описание="Разъём micro USB-B", Фамилия=Засецкий
X2: library part x0001, "=Описание", Contact_01=+5В, Contact_02=MISO, Contact_03=MOSI, Contact_04=SCK, Contact_05=nCS, Contact_06=GND, Наименование=DS1021-2*3SF11, Описание="Разъём штыревой 2x3 контактов", Фамилия=Засецкий

## Free pads (board coordinates)
  round 3 hole 1.5: 2(38,2) 2(38,18)

## Via types
v1: diameter 0.6, hole 0.3, Top Layer to Bottom Layer, 17 vias

## Nets (pads, with @x,y where several pads share a name; then routed paths per layer and width w, separated by ;. In a path a pad name is that pad's centre, name@x,y a point inside that pad or via, vN(x,y) a via of type N, cw(c..) or ccw(c..) an arc to the next point about the centre after c; other vN are vias at no path point)
+3.45В: C1.2 C2.1 DD1.5 DD1.6 R2.1 R9.1 | length 18.5
  Top Layer w0.25: DD1.5 DD1.6 21.6,11.25 22,11.65 22.79,11.65 C1.2 C2.1 24.11,11.7 24.554,11.7 24.7,11.846 24.7,12.1 26.2,13.6 26.75,13.6 27.05,13.3 27.975,13.3 R9.1 28,18.4 26.85,19.55 24.7,19.55 24.4,19.25 24.4,18.475 R2.1
+5В: C3.1 C4.2 DD1.7 DD1.8 HL1.1 L1.2 R7.1 R8.1 VD1.1 VD1.8 VD2.2 | length 16.1
  Top Layer w0.25: DD1.8 20.15,12.86 20.64,13.35 C3.1 20.65,13.34 DD1.7
  Top Layer w0.5: v1(8.9,18) 8.9,16.025 L1.2 8.875,14.325 9.6,13.6 VD1.1 ; R8.1@11.268,8.107 R8.1 ; R8.1@11.275,8.05 R7.1 ; v1(13.3,14.2) 13.9,13.6 VD1.8 ; C3.1 20.665,13.355 20.665,14.595 C4.2 ; v1(32.45,2.25) VD2.2
CN_5V: L1.1 X1.1 | length 4.8
  Top Layer w0.5: X1.1 5.725,12.625 6.525,12.625 7.525,13.625 L1.1 L1.1@7.425,16.1
CN_D_N: VD1.2 X1.2 | length 4.5
  Top Layer w0.381: X1.2 5.712,12.013 9.282,12.013 9.6,12.33 VD1.2
CN_D_P: VD1.3 X1.3 | length 4.5
  Top Layer w0.381: X1.3@5.769,11.469 5.861,11.378 9.282,11.378 9.6,11.06 VD1.3
CN_MISO: R5.2 S2.4 X2.2 | length 18.8
  Top Layer w0.15: v1(19.1,6.2) R5.2 ; v1(26,7.05) 31.94,7.05 X2.2
  Bottom Layer w0.15: S2.4 17.89,6.2 v1(19.1,6.2) 19.125,6.225 19.125,6.725 19.45,7.05 v1(26,7.05)
CN_MOSI: R4.2 X2.3 | length 18.2
  Top Layer w0.15: R4.2 v1(22.8,2.9)
  Bottom Layer w0.15: 22.4,2.9 v1(22.8,2.9) 23.561,2.9 32.321,11.66 33.336,11.66 34.225,10.771 35.139,10.771 X2.3
CN_nCS: R6.2 S2.2 X2.5 | length 26.3
  Top Layer w0.15: R6.2 v1(22.8,1.25) ; v1(29.75,8.2) 31,9.45 31,10.9 31.908,11.808 33.244,11.808 34.225,12.789 35.139,12.789 X2.5
  Bottom Layer w0.15: S2.2 18.72,2.43 19.05,2.1 22.35,2.1 22.714,1.736 22.714,1.336 v1(22.8,1.25) v1(29.75,8.2)
CN_SCK: R3.2 X2.4 | length 17.6
  Top Layer w0.15: v1(19.1,4.55) R3.2 ; v1(27.35,7.65) 30,7.65 X2.4
  Bottom Layer w0.15: v1(19.1,4.55) 19.1,5.15 20.3,6.35 26.05,6.35 v1(27.35,7.65)
GND: C1.1 C2.2 C3.2 C4.1 C5.2 DD1.2 R1.1 VD1.4 VD1.5 X1.5 X1.TP1 X2.6 | length 2.3
  Top Layer w0.25: 19.4,10 20.15,9.25 DD1.2
MCU_D_N: DD1.4 VD1.7 | length 14.8
  Top Layer w0.15: DD1.4 21.394,10.231 21.69,10.231 21.719,10.202 21.95,10.202 22.125,10.377 22.687,10.377 22.91,10.6 v1(23,10.6)
  Top Layer w0.381: v1(13.45,12.7) 13.45,12.662 14.1,12.013 14.732,12.013 15.05,12.33 VD1.7
  Bottom Layer w0.15: v1(13.45,12.7) 13.45,12.602 14.1,11.952 21.369,11.952 22.721,10.6 v1(23,10.6)
MCU_D_P: DD1.3 VD1.6 | length 14.9
  Top Layer w0.15: DD1.3 21.394,9.769 21.69,9.769 21.719,9.798 22.117,9.798 22.292,9.973 22.687,9.973 22.91,9.75 v1(23,9.75)
  Top Layer w0.381: v1(13.448,10.8) 13.507,10.8 14.085,11.378 14.732,11.378 15.05,11.06 VD1.6
  Bottom Layer w0.15: v1(13.448,10.8) 13.448,10.896 14.1,11.548 21.202,11.548 v1(23,9.75)
MISO: DD1.24 R5.1 | length 2.5
  Top Layer w0.15: DD1.24 20.65,7.45 21,7.1 21.45,7.1 21.675,6.875 R5.1
MOSI: DD1.23 R4.1 | length 7.5
  Top Layer w0.15: R4.1 18.9,2.9 18.6,3.2 18.6,6.65 18.95,7 19.6,7 20.15,7.55 DD1.23
nCS: DD1.22 R6.1 | length 9.1
  Top Layer w0.15: DD1.22 19.65,7.5 19.45,7.3 18.8,7.3 18.25,6.75 18.25,1.75 18.75,1.25 R6.1@19.725,1.25 ; 20.034,6.916 20.166,6.916
NetHL1_2: HL1.2 R1.2 | length 1.4
  Top Layer w0.5: v1(14.55,15.3) 14.55,16.75
NetHL2_1: HL2.1 R2.2
NetR7_2: R7.2 S2.1 | length 9.2
  Top Layer w0.15: S2.1 10.73,2.43 14.675,6.375 R7.2@14.675,8.35
NetR8_2: R8.2 S2.3 | length 3.7
  Top Layer w0.15: S2.3 9.04,6.44 9.7,7.1 9.7,8.325 R8.2@9.725,8.35
NetVD2_1: VD2.1 X2.1 | length 3.6
  Top Layer w0.15: X2.1@35.35,7.92 X2.1 35.4,6.1 35.8,5.7 35.8,4.65 VD2.1
nRST: C5.1 DD1.9 R9.2 S1.2 | length 23.3
  Top Layer w0.15: v1(19.3,13.6) 19.3,13.2 19.65,12.85 DD1.9 ; S1.2@24.8,1.575 24.8,9.525 24.925,9.4 25.85,9.4 26.4,9.95 C5.1 ; v1(25.25,11.75) C5.1 ; R9.2 27.975,11.75 C5.1
  Bottom Layer w0.15: v1(19.3,13.6) 19.85,14.15 22.85,14.15 v1(25.25,11.75)
SCK: DD1.1 R3.1 | length 5.9
  Top Layer w0.15: DD1.1 21.394,8.731 21.919,8.731 22.7,7.95 22.7,4.8 22.45,4.55 R3.1
SPI_ACTIVITY: DD1.13 HL2.2 | length 11.8
  Top Layer w0.15: DD1.13 16.85,11.25 16.6,11.5 16.6,13.25 20.1,16.75 HL2.2
pads on no net: DD1.0 DD1.10 DD1.11 DD1.12 DD1.14 DD1.15 DD1.16 DD1.17 DD1.18 DD1.19 DD1.20 DD1.21 S1.1 X1.4
copper on no net: | length 3.5
  Top Layer w0.15: 16.075,18.45 16.2,18.325 16.2,16.75 ; 25.925,16.75 25.925,18.45

## Polygon pours and split planes (outlines as drawn)
+5В on Signal Layer 2 "Signal Layer 2-+5В" (solid, pour order 4): 0,20 0,0 40,0 40,20
GND on Bottom Layer "Bottom Layer-GND" (solid, pour order 8): 0,20 0,0 40,0 40,20
GND on Signal Layer 1 "Signal Layer 1-GND" (solid, pour order 10): 0,20 0,0 40,0 40,20
GND on Top Layer "Top Layer-GND" (solid, pour order 6): 0,20 0,0 40,0 40,20

## Silkscreen, mask and mechanical layers (free items; w line width, h text height)
Top Overlay:
  lines w0.2: 31,17.15 33.45,17.15 ; 31,18.3 33.5,18.3 ; 33.55,17.15 36,17.15 ; 33.55,18.3 36.05,18.3 ; 33.55,19.45 36.05,19.45 36.05,16.05 33.5,16.05 ; 33.5,16.05 33.5,19.45 31,19.45 31,16.05 33.5,16.05
  text "GND" at 31.3,18.5 h1.2
  text "nCS" at 33.95,18.5 h1.2
  text "SCK" at 31.35,17.35 h1.2
  text "MOSI" at 33.75,17.35 h1.2
  text "MISO" at 31.2,16.25 h1.2
  text "+5В" at 34,16.25 h1.2
  text "PWR" at 18.4,15.95 h1.2 r90
  text "SPI / ACT" at 28.6,15.95 h1.2 r90
  text "SPI" at 31.95,14.55 h1.2
  text "RESET" at 31.9,2.85 h1.2 r90
  text ".designation" at 39.85,1.95 h2 r90
Bottom Overlay:
  text ".pcb_dec_number" at 38.25,2 h2 r270
Board:
  the board outline again, w0.1
Assembly Notes (Mech5):
  text "'.title'" at 0,-2.5 h2
  text "'.project'_'.pcb_dec_number'['.Pcb_File_Name_No_Path']" at 0,-5 h2